# EAGLE board gameboyzero-split (EAGLE 8.4.1)
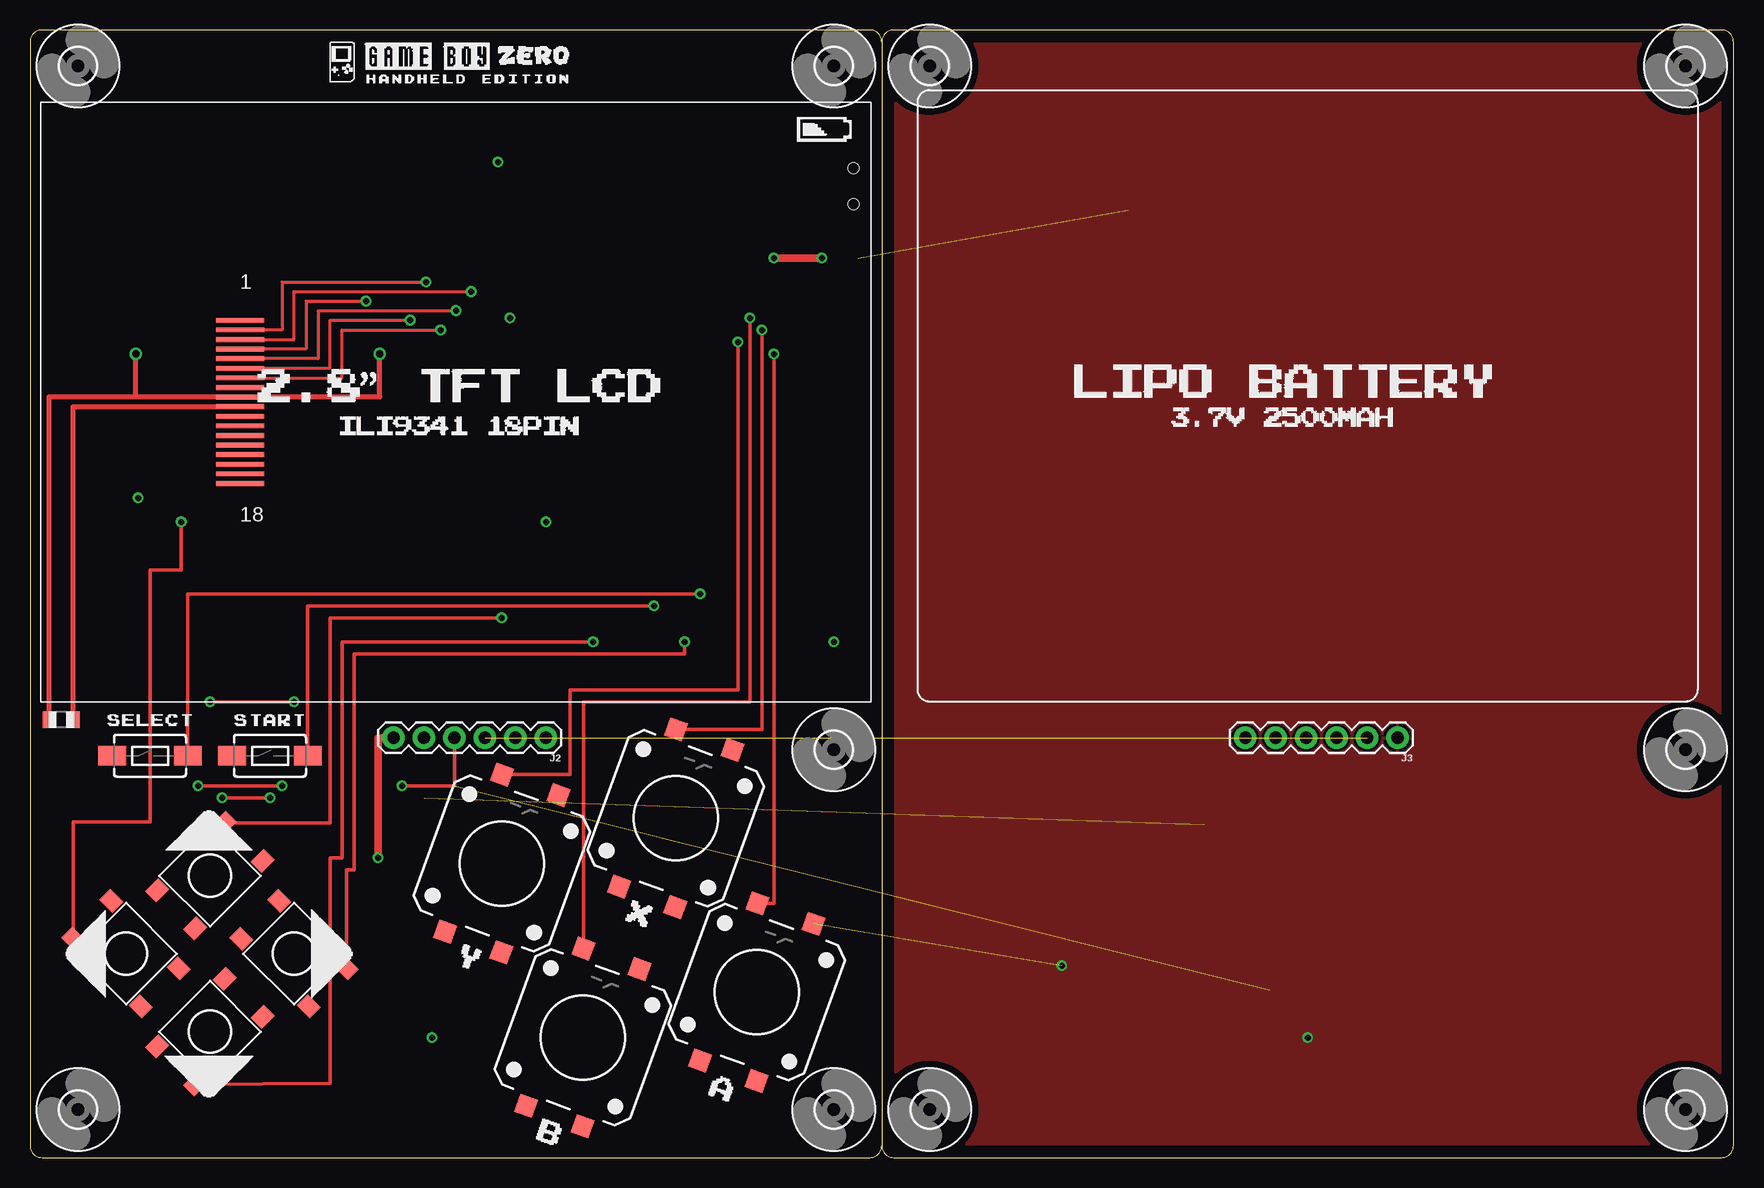
[diagram p0: board, top side]
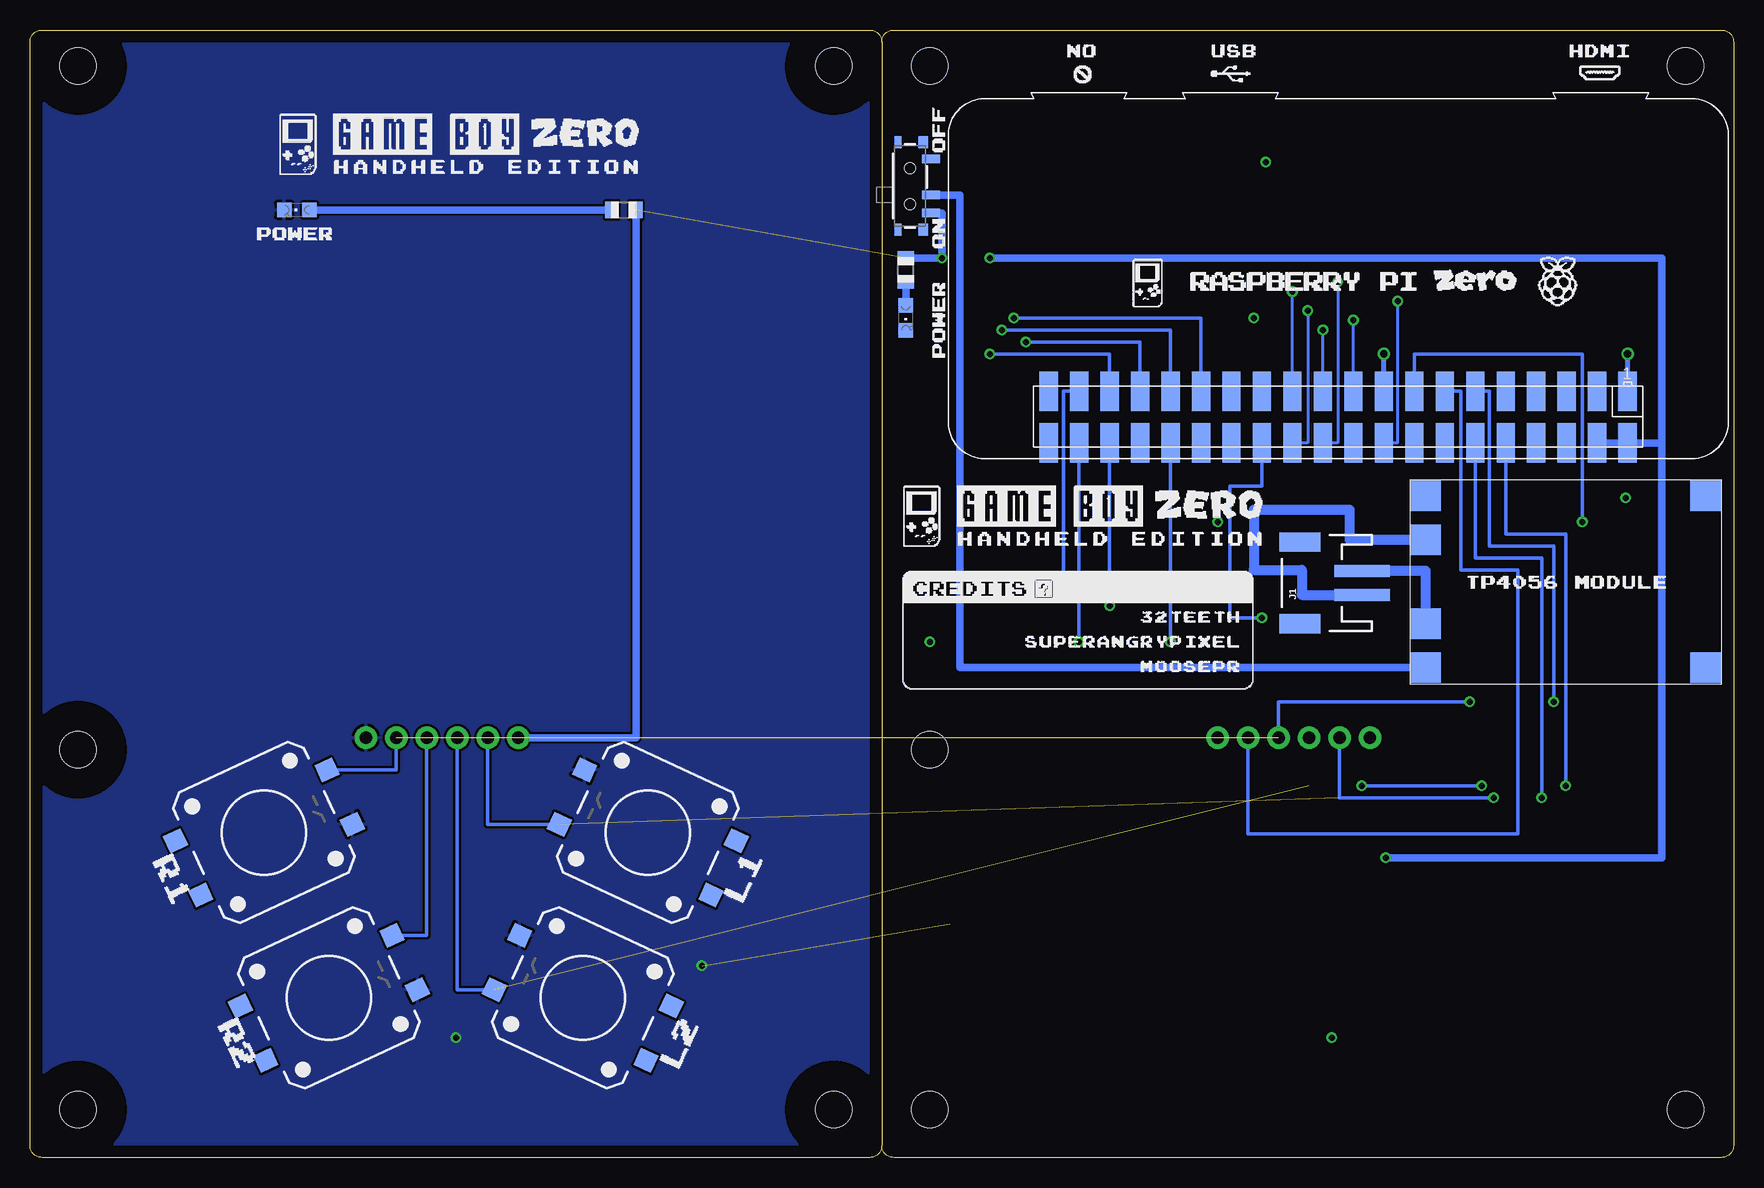
[diagram p1: board, bottom side, seen from below]

Size 142 x 94 mm. Coordinates in mm from the lower left corner, seen from the top.
Outline: 71,1 arc-90 70,0 1,0 arc-90 0,1 0,93 arc-90 1,94 70,94 arc-90 71,93
Outline: 71,93 71,1
Outline: 71,1 arc90 72,0 141,0 arc90 142,1 142,93 arc90 141,94 72,94 arc90 71,93
Copper layers (1*16): Top 0.035mm / dielectric 1.5mm / Bottom 0.035mm
Design rules "default": minimum track width 10mil, minimum drill 24mil, track to track 8mil, track to pad 8mil, pad to pad 8mil, via to via 8mil, smd to smd 8mil, copper to edge 40mil, drill to drill 8mil, minimum pad ring 10mil, minimum via ring 8mil, stop-mask expansion 4mil, vias tented up to drill 0mil, thermal gap 10mil

## Footprints (pad centres in the part's own frame; a part is rotated, then mirrored left to right if it is on the bottom)
TACTILE_SWITCH_SMD_12MM = smd 1.6 x 1.55: 1 6.975,-2.5; 2 -6.975,-2.5; 3 6.975,2.5; 4 -6.975,2.5
TACTILE_SWITCH_SMD_6.2MM_TALL = smd 1.55 x 1.3: A1 -3.975,-2.25; A2 3.975,-2.25; B1 -3.975,2.25; B2 3.975,2.25
TACTILE_SWITCH_SMD_6.0X3.5MM = smd 2.3 x 1.6: 1 -3.15,0; 2 3.15,0
3,0 = hole 3: 0,0
JST-2-SMD = smd 1 x 4.6: 1 -1,-3.7; 2 1,-3.7 | smd 1.6 x 3.4: NC1 -3.4,1.5; NC2 3.4,1.5
1X06 = drill 1.016 pad 1.88: 1 0,0; 2 2.54,0; 3 5.08,0; 4 7.62,0; 5 10.16,0; 6 12.7,0
CHIPLED_0805 = smd 1.2 x 1.2: A 0,-1.05; C 0,1.05
RASPBERRYPI_BASTELSTUBE_V13_RASPI_BOARD_B+_FULL = smd 1.524 x 3.302: 1 8.382,24.384; 2 8.382,28.702; 3 10.922,24.384; 4 10.922,28.702; 5 13.462,24.384; 6 13.462,28.702; 7 16.002,24.384; 8 16.002,28.702; 9 18.542,24.384; 10 18.542,28.702; 11 21.082,24.384; 12 21.082,28.702; 13 23.622,24.384; 14 23.622,28.702; 15 26.162,24.384; 16 26.162,28.702; 17 28.702,24.384; 18 28.702,28.702; 19 31.242,24.384; 20 31.242,28.702; 21 33.782,24.384; 22 33.782,28.702; 23 36.322,24.384; 24 36.322,28.702; 25 38.862,24.384; 26 38.862,28.702; 27 41.402,24.384; 28 41.402,28.702; 29 43.942,24.384; 30 43.942,28.702; 31 46.482,24.384; 32 46.482,28.702; 33 49.022,24.384; 34 49.022,28.702; 35 51.562,24.384; 36 51.562,28.702; 37 54.102,24.384; 38 54.102,28.702; 39 56.642,24.384; 40 56.642,28.702
03962A = smd 2.54 x 2.54: B+ 12,1.35; B- 5,1.35; IN+ 15.65,24.65; IN- 1.35,24.65; OUT+ 15.65,1.35; OUT- 1.35,1.35
R0805 = smd 1.1 x 1.4: 1 -1,0; 2 1,0
SWITCH_SPST_SMD_A = smd 0.7 x 1.5: 1 -2.25,-1.75; 2 -0.75,-1.75; 3 2.25,-1.75 | smd 1 x 0.6: GND1 -3.65,1; GND3 3.65,1 | smd 1 x 0.8: GND2 -3.65,-1.1; GND4 3.65,-1.1 | hole 0.9: -1.5,0; 1.5,0
GAMEBOYZEROHANDHELDDISPLAYS-2.8 = smd 4 x 0.4: P$1 -18,6.8; P$2 -18,6; P$3 -18,5.2; P$4 -18,4.4; P$5 -18,3.6; P$6 -18,2.8; P$7 -18,2; P$8 -18,1.2; P$9 -18,0.4; P$10 -18,-0.4; P$11 -18,-1.2; P$12 -18,-2; P$13 -18,-2.8; P$14 -18,-3.6; P$15 -18,-4.4; P$16 -18,-5.2; P$17 -18,-6; P$18 -18,-6.8

## Placement (x,y rotation side)
BTN_A  MOMENTARY-SWITCH-SPST-SMD-12MM  [TACTILE_SWITCH_SMD_12MM]  60.59,13.78 70 top
BTN_B  MOMENTARY-SWITCH-SPST-SMD-12MM  [TACTILE_SWITCH_SMD_12MM]  46.09,10.02 70 top
BTN_DOWN  MOMENTARY-SWITCH-SPST-SMD-6.2MM-TALL  [TACTILE_SWITCH_SMD_6.2MM_TALL]  15,10.5 225 top
BTN_L1  MOMENTARY-SWITCH-SPST-SMD-12MM  [TACTILE_SWITCH_SMD_12MM]  90.5,27.09 155 bottom
BTN_L2  MOMENTARY-SWITCH-SPST-SMD-12MM  [TACTILE_SWITCH_SMD_12MM]  95.92,13.31 155 bottom
BTN_LEFT  MOMENTARY-SWITCH-SPST-SMD-6.2MM-TALL  [TACTILE_SWITCH_SMD_6.2MM_TALL]  8,17 135 top
BTN_R1  MOMENTARY-SWITCH-SPST-SMD-12MM  [TACTILE_SWITCH_SMD_12MM]  122.5,27.09 25 bottom
BTN_R2  MOMENTARY-SWITCH-SPST-SMD-12MM  [TACTILE_SWITCH_SMD_12MM]  117.08,13.31 25 bottom
BTN_RIGHT  MOMENTARY-SWITCH-SPST-SMD-6.2MM-TALL  [TACTILE_SWITCH_SMD_6.2MM_TALL]  22,17 315 top
BTN_SELECT  MOMENTARY-SWITCH-SPST-SMD-6.0X3.5MM  [TACTILE_SWITCH_SMD_6.0X3.5MM]  10,33.5 0 top
BTN_START  MOMENTARY-SWITCH-SPST-SMD-6.0X3.5MM  [TACTILE_SWITCH_SMD_6.0X3.5MM]  20,33.5 0 top
BTN_UP  MOMENTARY-SWITCH-SPST-SMD-6.2MM-TALL  [TACTILE_SWITCH_SMD_6.2MM_TALL]  15,23.5 45 top
BTN_X  MOMENTARY-SWITCH-SPST-SMD-12MM  [TACTILE_SWITCH_SMD_12MM]  53.83,28.28 70 top
BTN_Y  MOMENTARY-SWITCH-SPST-SMD-12MM  [TACTILE_SWITCH_SMD_12MM]  39.33,24.52 70 top
H1  MOUNT-HOLE3.0  [3,0]  4,4 0 top
H2  MOUNT-HOLE2.8  [3,0]  67,4 0 top
H3  MOUNT-HOLE2.8  [3,0]  67,34 0 top
H4  MOUNT-HOLE2.8  [3,0]  4,91 0 top
H5  MOUNT-HOLE2.8  [3,0]  67,91 0 top
H6  MOUNT-HOLE2.8  [3,0]  75,4 0 top
H7  MOUNT-HOLE2.8  [3,0]  138,4 0 top
H8  MOUNT-HOLE2.8  [3,0]  138,34 0 top
H9  MOUNT-HOLE2.8  [3,0]  75,91 0 top
H10  MOUNT-HOLE2.8  [3,0]  138,91 0 top
J1  [JST-2-SMD]  34.65,47.9 90 bottom
J2  [1X06]  43,35 180 top
J3  [1X06]  114,35 180 top
LED1  [CHIPLED_0805]  69,70 180 bottom
LED2  [CHIPLED_0805]  119.75,79 90 bottom
PI1  RPI-ZERO  [RASPBERRYPI_BASTELSTUBE_V13_RASPI_BOARD_B+_FULL]  0.45,88.27 180 bottom
POWER1  03962A  [03962A]  27,56.5 270 bottom
R1  3R9  [R0805]  2.6,36.5 180 top
R2  1K  [R0805]  69,74 90 bottom
R3  1K  [R0805]  92.5,79 0 bottom
S2  [SWITCH_SPST_SMD_A]  68.65,81 90 bottom
SCREEN1  GAMEBOYZEROHANDHELDDISPLAYS-2.8  [GAMEBOYZEROHANDHELDDISPLAYS-2.8]  35.5,63 0 top

## Library data of the parts
BTN_A BTN_B BTN_L1 BTN_L2 BTN_R1 BTN_R2 BTN_X BTN_Y = SparkFun-Switches; PROD_ID: SWCH-11967; SF_SKU: COM-12993
BTN_DOWN BTN_LEFT BTN_RIGHT BTN_UP = SparkFun-Switches; PROD_ID: SWCH-11966; SF_SKU: COM-12992
BTN_SELECT BTN_START = SparkFun-Switches; PROD_ID: SWCH-00815; SF_SKU: COM-08229
H1-H10 = holes
J1 = SparkFun-Connectors; PROD_ID: CONN-11443; SF_ID: PRT-08612
J2 J3 = SparkFun-Connectors; PROD_ID: CONN-08437
LED1 LED2 R1-R3 = adafruit
PI1 = RPI-Zero
POWER1 = 03962A
S2 = SparkFun-Switches; PROD_ID: SWCH-10651; SF_SKU: COM-10860
SCREEN1 = GameboyZeroHandheldDisplays

## Nets
3V3: PI1.1 PI1.17 R1.2 SCREEN1.P$9
3V3100OHM: R1.1 SCREEN1.P$10
A: BTN_A.3 PI1.35
B: BTN_B.3 PI1.29
BATT+: J1.2 POWER1.B+
BATT-: J1.1 POWER1.B-
CSX: PI1.24 SCREEN1.P$5
D/CX: PI1.18 SCREEN1.P$4
DOWN: BTN_DOWN.B2 PI1.32
GND: BTN_A.1 BTN_B.1 BTN_DOWN.A2 BTN_L1.1 BTN_L2.1 BTN_LEFT.A2 BTN_R1.1 BTN_R2.1 BTN_RIGHT.A2 BTN_SELECT.1 BTN_START.1 BTN_UP.A2 BTN_X.1 BTN_Y.1 J2.1 J3.1 LED1.C LED2.C PI1.6 PI1.9 PI1.14 PI1.20 PI1.25 PI1.30 PI1.34 PI1.39 POWER1.OUT- SCREEN1.P$1 SCREEN1.P$8 SCREEN1.P$11 SCREEN1.P$12 SCREEN1.P$13 SCREEN1.P$14
L1: BTN_L1.3 J2.5 J3.5 PI1.12
L2: BTN_L2.3 J2.4 J3.4 PI1.10
LED: LED1.A R2.1
LED1: LED2.A R3.1
LEFT: BTN_LEFT.B2 PI1.15
R1: BTN_R1.3 J2.2 J3.2 PI1.13
R2: BTN_R2.3 J2.3 J3.3 PI1.11
RESET: PI1.22 SCREEN1.P$2
RIGHT: BTN_RIGHT.B2 PI1.38
SCL: PI1.23 SCREEN1.P$3
SDI: PI1.19 SCREEN1.P$6
SDO: PI1.21 SCREEN1.P$7
SELECT: BTN_SELECT.2 PI1.37
START: BTN_START.2 PI1.36
SWITCH_IN+: POWER1.OUT+ S2.2
SWITCH_OUT+: J2.6 J3.6 PI1.2 PI1.4 R2.2 R3.2 S2.1
UP: BTN_UP.B2 PI1.26
X: BTN_X.3 PI1.31
Y: BTN_Y.3 PI1.33

## Tracks (layer width: path | path; a pad name or v marks a point on that pad's centre or on a via)
3V3  (via drill 0.6)
  Top 0.406: R1.2 1.6,63.4 8.83,63.4 | 8.83,63.4 v8.83,67 | v29.15,67 29.15,63.4 SCREEN1.P$9 8.83,63.4
  Bottom 0.406: v8.83,67 8.83,64.65 PI1.1 | v29.15,67 29.15,64.65 PI1.17
3V3100OHM
  Top 0.406: R1.1 3.6,62.6 SCREEN1.P$10
A  (via drill 0.5)
  Top 0.305: BTN_A.3 62,21.19 v62,67
  Bottom 0.254: 52.01,64.65 PI1.35
  Bottom 0.305: PI1.35 52.01,67 v62,67
B  (via drill 0.5)
  Top 0.305: BTN_B.3 46.13,38 60,38 v60,70
  Bottom 0.254: 44.39,64.65 44.39,63
  Bottom 0.305: 44.39,63 PI1.29 44.39,70 v60,70
BATT+
  Bottom 0.813: POWER1.B+ 25.65,48.9 J1.2
BATT-
  Bottom 0.813: POWER1.B- 32,51.5 32,54 40,54 40,49 36,49 36,46.9 J1.1
CSX  (via drill 0.5)
  Top 0.254: v35.5,70.6 24,70.6 24,66.6 SCREEN1.P$5
  Bottom 0.254: v35.5,70.6 35.5,59.57 PI1.24 36.77,58.81
D/CX  (via drill 0.5)
  Top 0.254: v28,71.4 23,71.4 23,67.4 SCREEN1.P$4
  Bottom 0.254: v28,71.4 28,59.57 PI1.18 29.15,58.81
DOWN  (via drill 0.5)
  Top 0.305: BTN_DOWN.B2 25,6.2 25,25 26,25 26,43 v46.93,43
  Bottom 0.254: PI1.32 46.93,59
  Bottom 0.305: 46.93,59 v46.93,43
  Bottom 0.406: 46.93,58.81 46.93,59
GND  (via drill 0.5)  (1 unrouted)
  other vias: 9,55 39,83 40,70 43,53 67,43 106.5,10 86,16 33.5,10
  pour Bottom: 71,0 71,94 142,94 142,0
  pour Top: 142,94 142,0 71,0 71,94
L1  (via drill 0.5)  (1 unrouted)
  Top 0.305: v16,30 v20,30
  Bottom 0.305: BTN_L1.3 103.84,27.78 J3.5 | PI1.12 21.53,50 16,50 v16,30 | v20,30 32.84,30 J2.5
L2  (via drill 0.5)  (1 unrouted)
  Top 0.305: J2.4 35.38,31 v31,31 | v21,31 v14,31
  Bottom 0.305: BTN_L2.3 106.38,13.99 J3.4 | 18.99,58.81 18.99,52 14,52 v14,31 | v31,31 v21,31
  Bottom 0.406: PI1.10 18.99,58.81
LED
  Bottom 0.61: LED1.A R2.1
LED1
  Bottom 0.61: R3.1 LED2.A
LEFT  (via drill 0.5)
  Top 0.305: BTN_LEFT.B2 3.6,28 10,28 10,49 12.6,49 v12.6,53
  Bottom 0.305: v12.6,53 12.6,67 26.61,67 26.61,64.65 PI1.15
R1  (1 unrouted)
  Bottom 0.254: 24.07,64.65 PI1.13
  Bottom 0.305: BTN_R1.3 111.46,32.31 J3.2 | PI1.13 22.75,63.89 22.75,49 18,49 18,27 40.46,27 J2.2
R2  (via drill 0.5)  (1 unrouted)
  Top 0.305: v15,38 v22,38
  Bottom 0.254: 21.53,64.65 PI1.11
  Bottom 0.305: BTN_R2.3 108.92,18.52 J3.3 | PI1.11 20.35,63.89 20.35,51 15,51 v15,38 | v22,38 37.92,38 J2.3
RESET  (via drill 0.5)
  Top 0.254: v33,73 21,73 21,69 SCREEN1.P$2
  Bottom 0.254: v33,73 33,59.57 PI1.22 34.23,58.81
RIGHT  (via drill 0.5)
  Top 0.305: BTN_RIGHT.B2 26.4,24 27,24 27,42 54.55,42 v54.55,43
  Bottom 0.254: PI1.38 54.55,59
  Bottom 0.305: 54.55,59 v54.55,43
  Bottom 0.406: 54.55,58.81 54.55,59
SCL  (via drill 0.5)
  Top 0.254: SCREEN1.P$3 22,68.2 22,72.2 v36.77,72.2
  Bottom 0.254: 36.77,63 PI1.23 | 36.77,63 v36.77,72.2 | 36.77,64.65 36.77,63
SDI  (via drill 0.5)
  Top 0.254: SCREEN1.P$6 25,65.8 25,69.8 v31.69,69.8
  Bottom 0.254: v31.69,69.8 31.69,64.65 PI1.19
SDO  (via drill 0.5)
  Top 0.254: SCREEN1.P$7 26,65 26,69 v34.23,69
  Bottom 0.254: v34.23,69 34.23,64.65 PI1.21
SELECT  (via drill 0.5)
  Top 0.305: BTN_SELECT.2 13.15,47 v55.85,47
  Bottom 0.254: 54.55,64.65 PI1.37
  Bottom 0.305: PI1.37 55.85,63.89 v55.85,47
START  (via drill 0.5)
  Top 0.305: BTN_START.2 23.15,46 v52,46
  Bottom 0.254: PI1.36 52.01,59
  Bottom 0.305: 52.01,59 v52.01,46 v52,46
  Bottom 0.406: 52.01,58.81 52.01,59
SWITCH_IN+
  Bottom 0.61: S2.2 64.5,80.25 64.5,40.85 POWER1.OUT+
SWITCH_OUT+  (via drill 0.5)  (1 unrouted)
  Top 0.61: v62,75 v66,75 | J2.6 29,35 v29,25
  Bottom 0.254: PI1.4 11.37,58.81 | PI1.2 8.83,58.81
  Bottom 0.61: R2.2 v66,75 66,78.75 S2.1 | PI1.4 PI1.2 6,59.57 | 6,59.57 6,75 v62,75 | v29,25 6,25 6,59.57 | R3.2 91.5,35 J3.6
UP  (via drill 0.5)
  Top 0.305: BTN_UP.B2 25,27.9 25,45 v39.31,45
  Bottom 0.254: PI1.26 39.31,59
  Bottom 0.305: 39.31,58.81 39.31,56 42,56 42,45 v39.31,45
  Bottom 0.406: 39.31,59 39.31,58.81
X  (via drill 0.5)
  Top 0.305: BTN_X.3 61,35.69 v61,69
  Bottom 0.254: 46.93,64.65 PI1.31
  Bottom 0.305: PI1.31 46.93,69 v61,69
Y  (via drill 0.5)
  Top 0.305: v59,68 59,39 45,39 45,31.93 BTN_Y.3
  Bottom 0.254: 49.47,64.65 49.47,63
  Bottom 0.305: 49.47,63 PI1.33 49.47,68 v59,68